# Altium PCB bangmach1.PcbDoc
Units mm, origin at the board's own origin, x right, y up, seen from the top; angles counter-clockwise.
Board outline 99.36 x 91.36 mm, 2 copper layers (Top Layer, Bottom Layer), stack 1.535 mm thick; 51 components, 66 nets, 246 pads, 156 vias.
Unrouted connection lines stored in the file: 2.
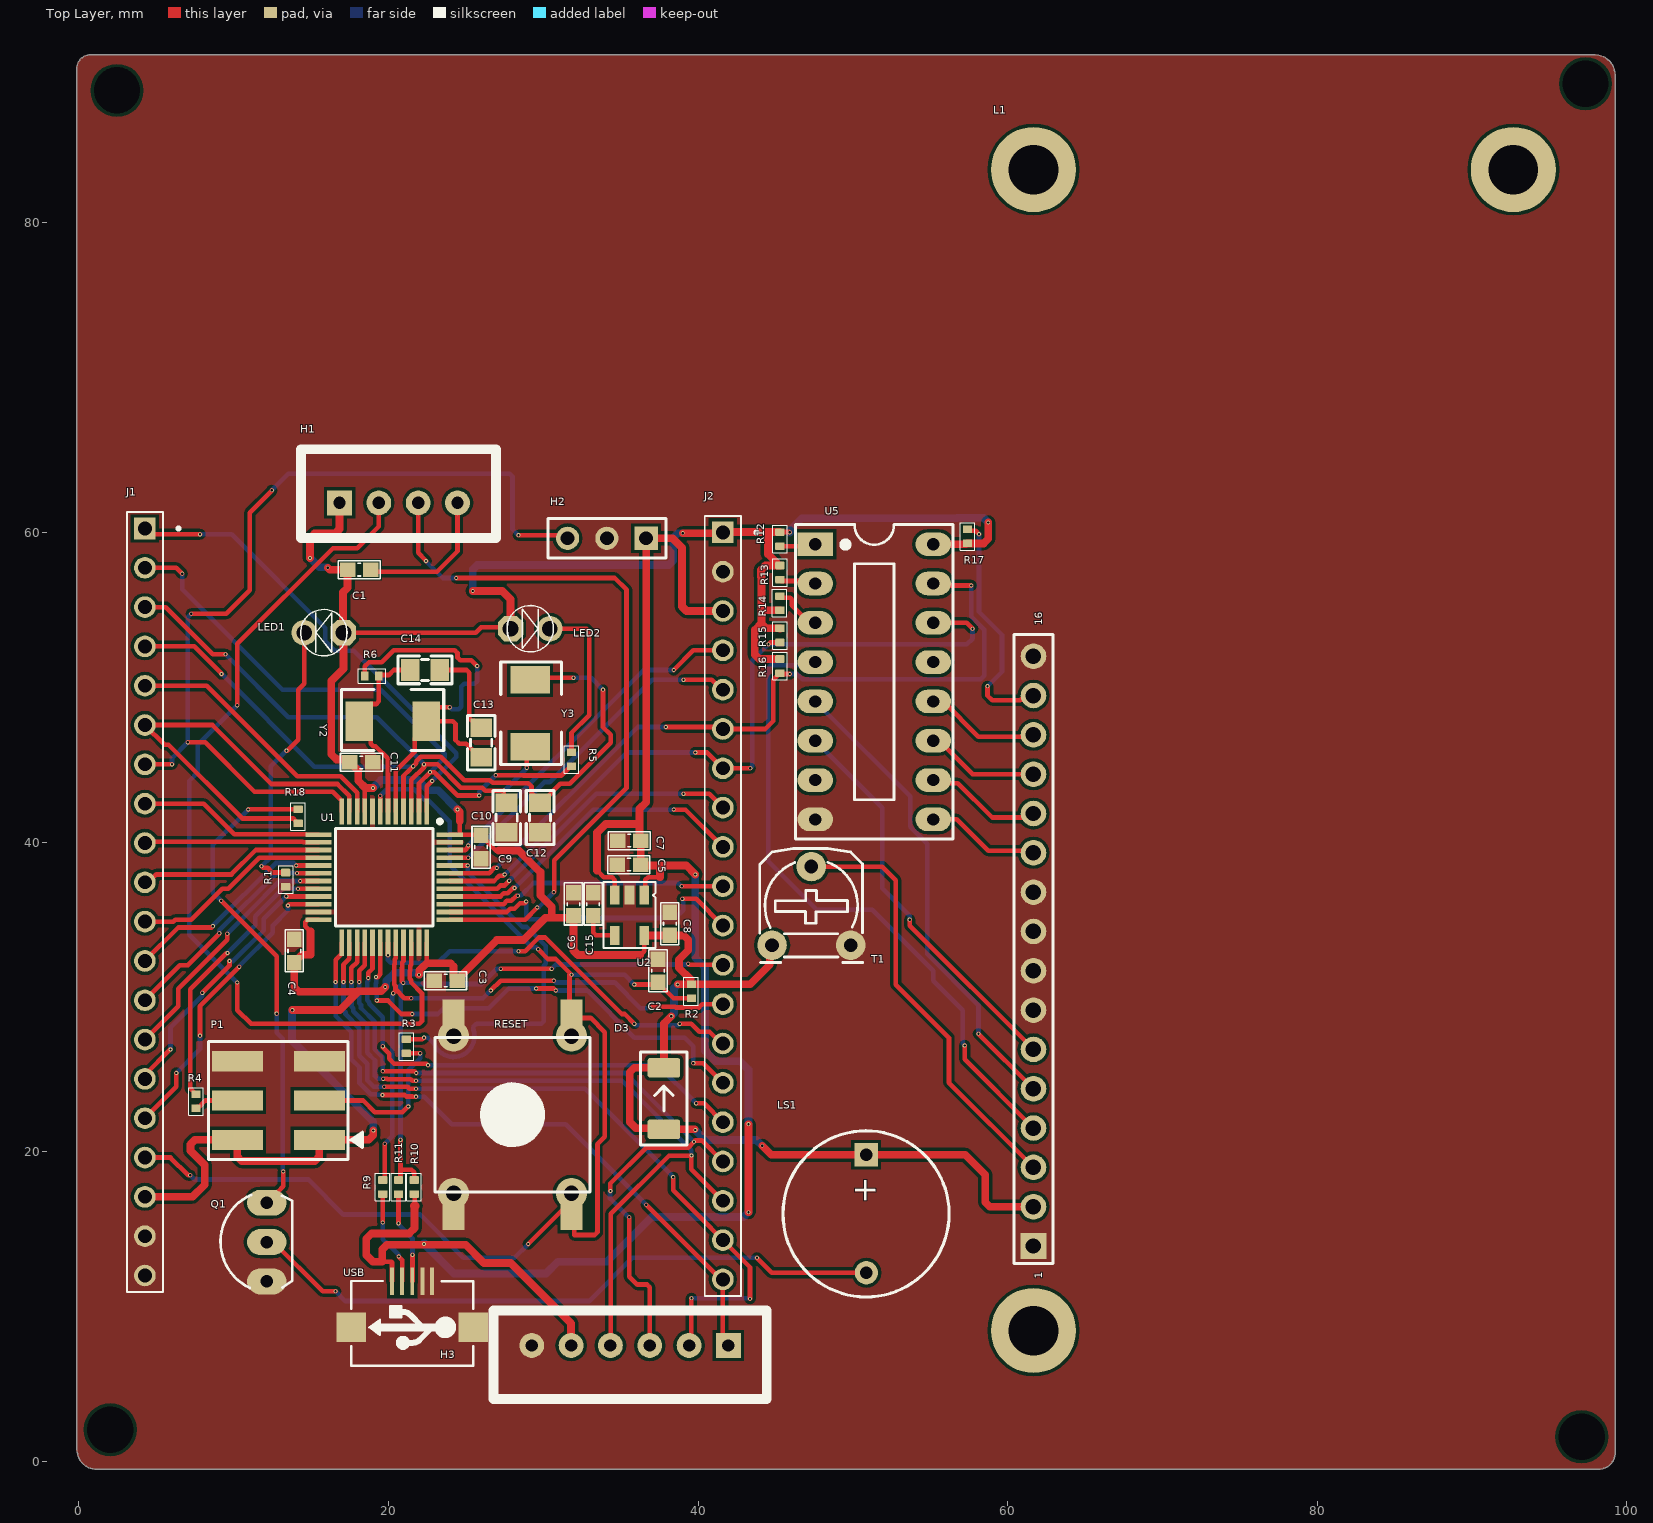
[diagram p0: Top Layer view]
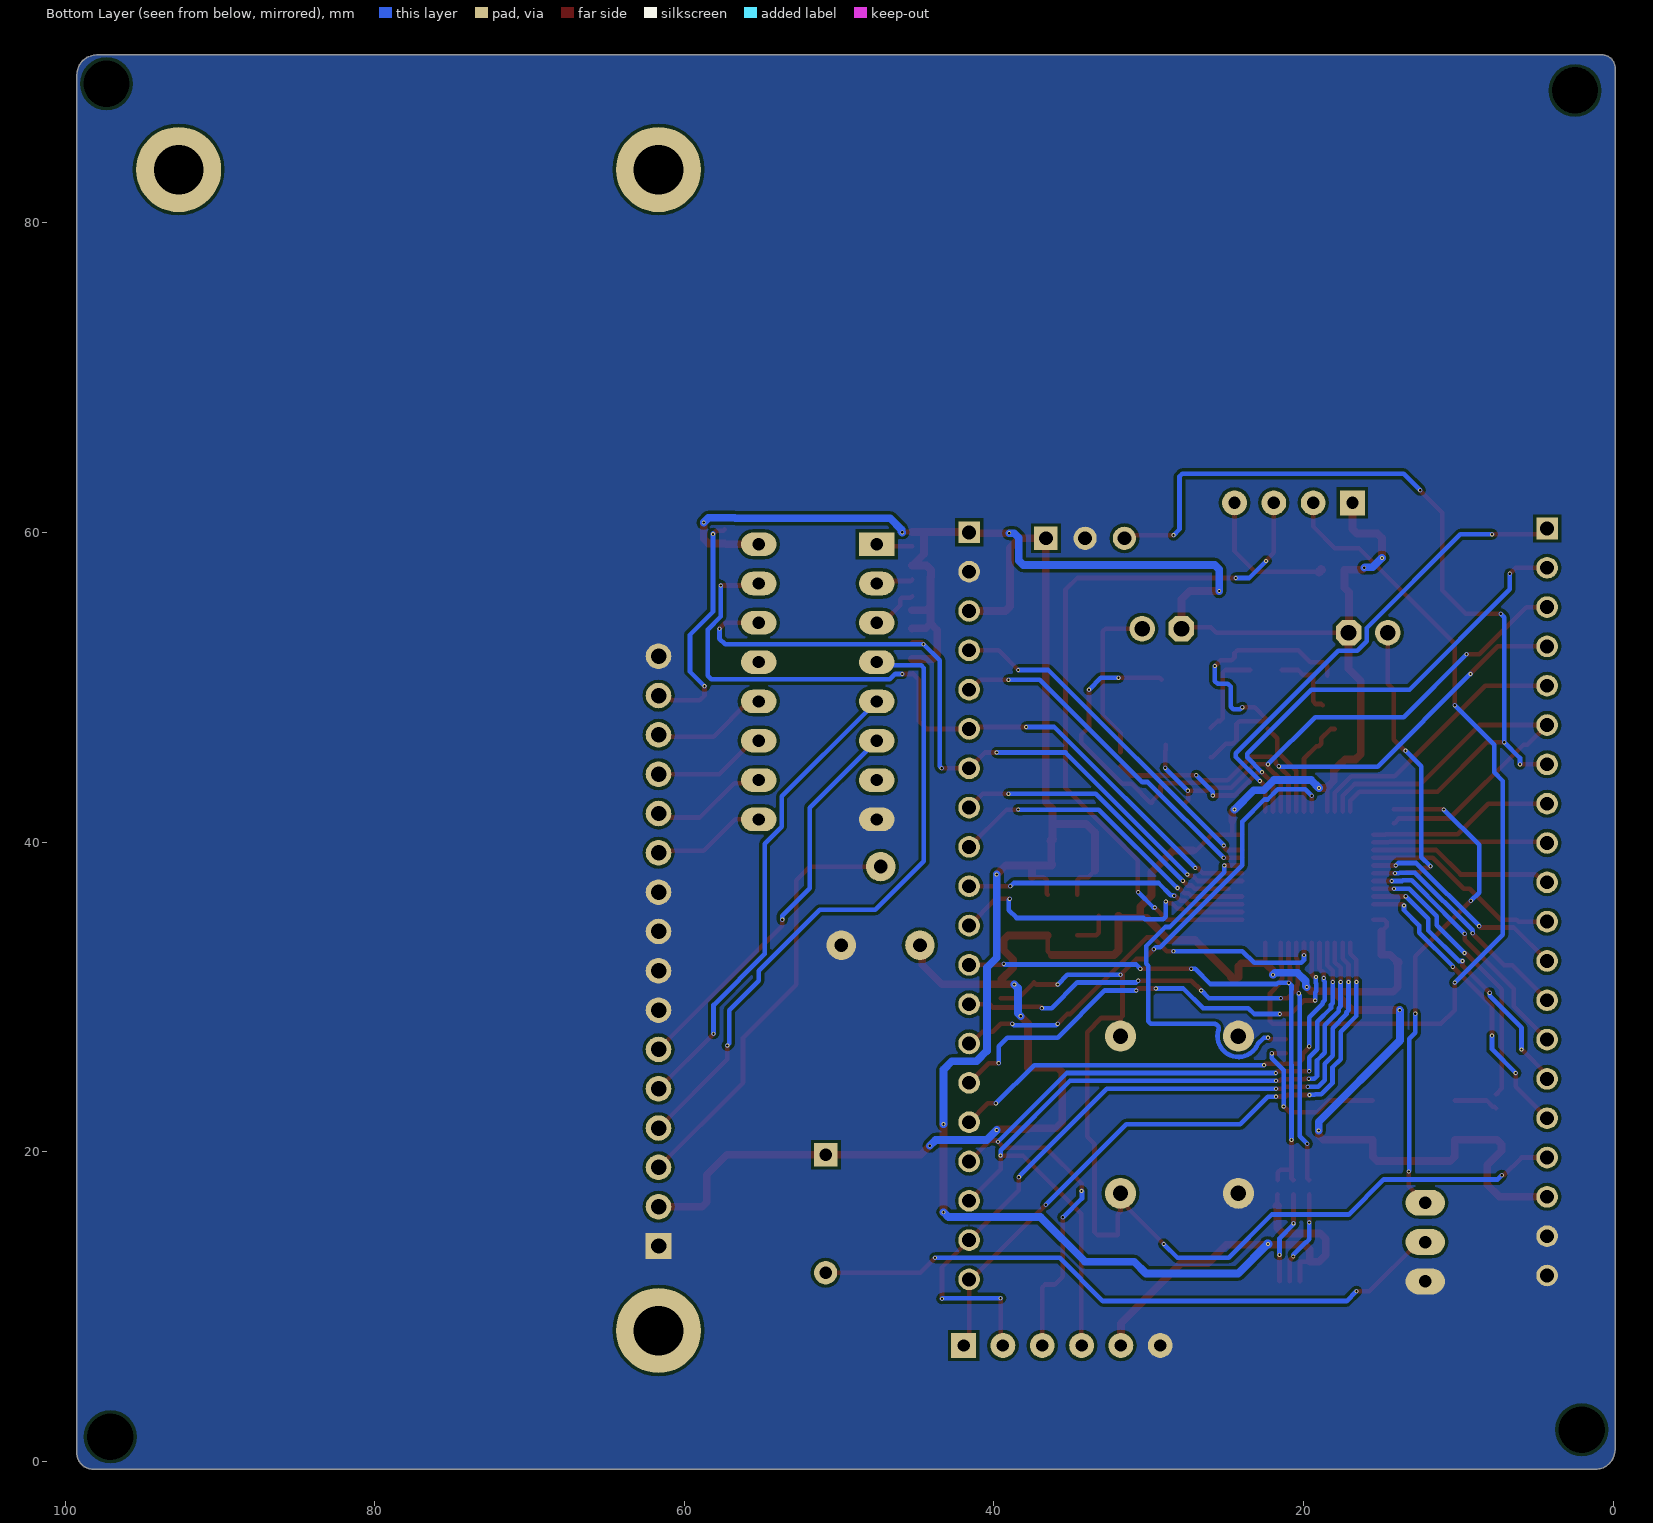
[diagram p1: Bottom Layer view, seen from below]
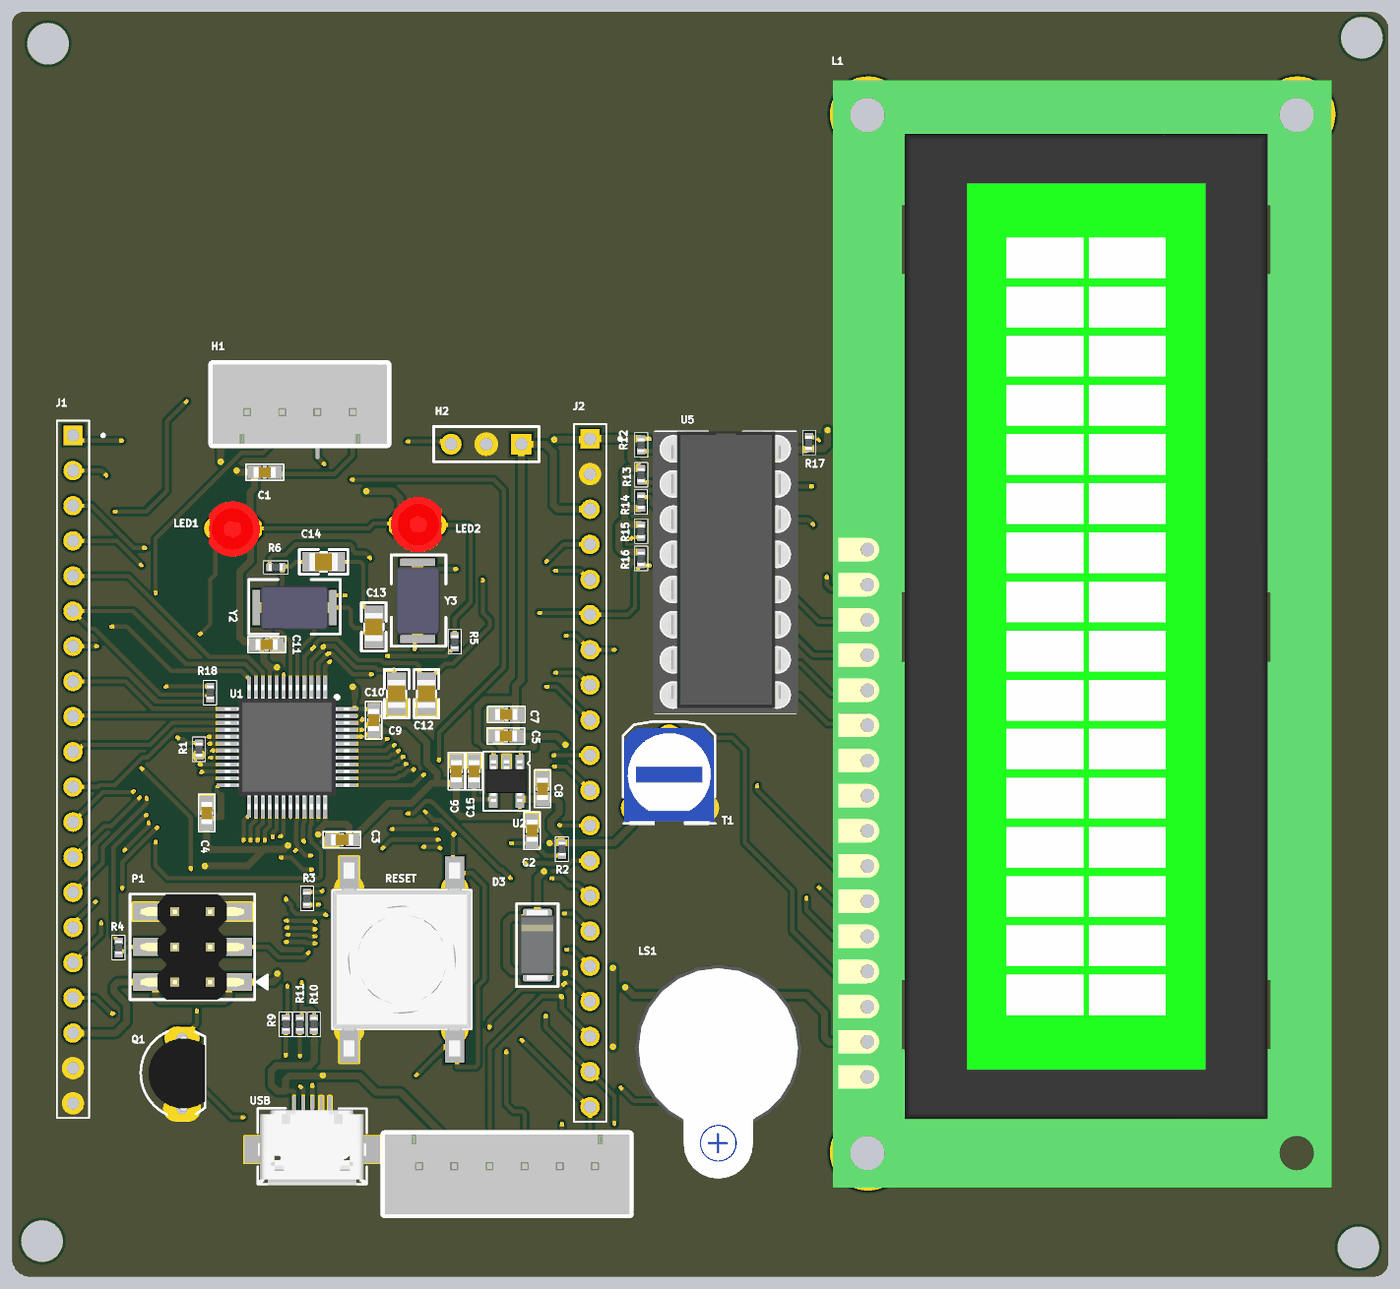
[diagram p2: 3D render of the assembled board from above, using the file's embedded part models]

## Layer stack, top to bottom
Top Solder: solder mask 0.0254, SM-001, Dk 4
Top Layer: signal copper 0.035
Dielectric 1: core 1.465, Core-043, Dk 4.3
Bottom Layer: signal copper 0.035
Bottom Solder: solder mask 0.0254, SM-001, Dk 4

## Board outline
-0.127,0.762 -0.127,90.018 cw(c0.711,90.018) 0.711,90.856 97.968,90.856 cw(c97.968,89.586) 99.238,89.586 99.238,0.533 cw(c98.196,0.533) 98.196,-0.508 1.143,-0.508 cw(c1.143,0.762)

## Design rules (kind name [scope] priority, off if disabled: settings)
Clearance [All] p1: gap=0.2 ignorepadtopadclearanceinfootprint=FALSE
PlaneConnect [All] p1: planeconnectstyle=Direct reliefexpansion=0.508 reliefentries=4 reliefconductorwidth=0.254 reliefairgap=0.254
PolygonConnect [All] p1: connectstyle=Direct reliefconductorwidth=0.254 reliefentries=4 polygonreliefangle="90 Angle" airgapwidth=0.254
RoomDefinition schematic [InComponentClass('schematic')] p1: confinementstyle=ConfineIn formatcopy=TRUE lockcomponents=FALSE outline -48.569,-33.587 2.231,-33.587 2.231,-8.187 -48.569,-8.187
RoutingVias [All] p1: holewidth=0.15 width=0.25 viastyle="Through Hole" minholewidth=0.15 minwidth=0.25 maxholewidth=0.15 maxwidth=0.25
ShortCircuit [All] p1: allowed=TRUE
SolderMaskExpansion [All] p1: expansion=0.102 istentingtop=FALSE
UnRoutedNet [All] p1: checkbadconnections=TRUE
Width [All] p1: maxlimit=1 minlimit=0.3 preferedwidth=0.5 minimp=50.000000 maximp=50.000000 favimp=50.000000
27 further rules are at their usual default settings.

## Components (designator, comment, footprint, x,y, rotation, side; value= is the part's Value field where it differs from the comment)
C1 "104" "tu 0603" 18.106,57.599 r0 top
C2 "105" "tu 0603" 37.41,31.691 r90 top
C3 "104" "tu 0603" 23.694,31.056 r180 top
C4 "104" "tu 0603" 13.915,32.973 r90 top
C5 "105" "tu 0603" 35.531,38.549 r180 top
C6 "106" "tu 0603" 31.949,35.997 r90 top
C7 "104" "tu 0603" 35.556,40.099 r180 top
C8 "104" "tu 0603" 38.172,34.727 r90 top
C9 "20pF" "tu 0805" 27.631,41.597 r270 top
C10 "104" "tu 0603" 25.98,39.692 r270 top
C11 "104" "tu 0603" 18.245,45.153 r0 top
C12 "20pF" "tu 0805" 29.79,41.597 r270 top
C13 "20p" "tu 0805" 25.98,46.423 r90 top
C14 "20p" "tu 0805" 22.354,51.126 r0 top
C15 "223" "tu 0603" 33.219,35.997 r90 top
D3 "1N4007" "DO-214AC-2 (SMA)" 37.791,23.436 r90 top
H1 "SWD" XH2.54M-4 16.836,61.917 r0 top
H2 "Header 3" HDR1X3 36.648,59.631 r180 top
H3 "Header 6P 2.54 Duc Thang" XH2.54M-6 41.957,7.485 r180 top
J1 "2-87220-0" TE_2-87220-0 4.263,36.136 r270 top
J2 "2-87220-0" TE_2-87220-0 41.601,35.882 r270 top
L1 "LCD16x2" "LCD16X2_3 HOLES" 59.127,5.911 r90 top
LED1 "LED 3mm" LED-3MM-RED 17.09,53.535 r180 top
LED2 "LED 3mm" LED-3MM-RED 27.885,53.789 r0 top
LS1 "Coi báo" "Coi Chip Speacker" 50.86,19.804 r270 top
P1 "95278-101A06LF" HDR_M_2X3_2.54_SMD 12.882,23.309 r90 top
Q1 "C1815" TO92 12.137,14.165 r90 top value=C9014
R1 "510" "RES 0402" 13.356,37.584 r270 top
R2 "10k" "RES 0402" 39.569,30.368 r90 top
R3 "100k" "RES 0402" 21.154,26.812 r270 top
R4 "100k" "RES 0402" 7.565,23.256 r90 top
R5 "510" "RES 0402" 31.822,45.354 r270 top
R6 "1M" "RES 0402" 18.921,50.741 r180 top
R9 "20" "RES 0402" 19.63,17.721 r90 top
R10 "4.7K" "RES 0402" 21.662,17.721 r90 top
R11 "20" "RES 0402" 20.646,17.721 r90 top
R12 "10K" "RES 0402" 45.284,59.578 r270 top
R13 "10K" "RES 0402" 45.284,57.419 r270 top
R14 "10K" "RES 0402" 45.284,55.44 r90 top
R15 "10K" "RES 0402" 45.284,53.355 r270 top
R16 "10K" "RES 0402" 45.284,51.376 r270 top
R17 "330" "RES 0402" 57.4,59.756 r270 top
R18 "4.7K" "RES 0402" 14.169,41.671 r90 top
RESET "5ESH935" SW_5ESH935 28.012,22.393 r0 top
T1 "10K" "Bien Tro Tam Giac Dung" 44.776,33.342 r0 top
U1 "STM32F103C8T6" LQFP-48_19.6_393_58X11_SMD 19.721,37.74 r270 top
U2 "RT9193-33GB" SOT23-5 35.569,35.287 r180 top
U5 "PCF8574" DIP16 47.57,59.25 r270 top
USB "USB Micro 5p SMD" "USB Micro 5p SMD" 21.535,11.625 r180 top
Y2 "8Mhz" "Thach Anh 2 chan SMD5032" 20.265,47.82 r0 top value=4Mhz
Y3 "32.768K" "Thach Anh 2 chan SMD5032" 29.155,48.328 r270 top value=4Mhz

## Footprints (in the part's own frame and the unit in brackets; to place one, negate y for a bottom-side part, rotate by r counter-clockwise, add the part's x,y. Pads: shape width x height; smd on the part's side, far side on the other; paste and mask are expansions set on the pad)
"Bien Tro Tam Giac Dung" [mil] "RM065"
  round 75 hole 35: 1(0,0) 2(100,200) 3(200,0)
  silkscreen extent -31,-44 231,246, body extent -28,-50 228,228, height 279
"Coi Chip Speacker" [mm]
  rect 1.5x1.5 hole 0.8: 1(0,0)
  round 1.5 hole 0.8: 2(7.62,0.013)
  silkscreen extent -1.55,-5.38 9.18,5.36, body extent -2.22,-6 13.24,6, height 4.5
DIP16 [mil] "16 PIN, W 300mil, Pin to pin 100mil"
  rect 60x90 hole 31: 1(0,0)
  oval 60x90 hole 31: 2(100,0) 3(200,0) 4(300,0) 5(400,0) 6(500,0) 7(600,0) 8(700,0) 9(700,300) 10(600,300) 11(500,300) 12(400,300) 13(300,300) 14(200,300) 15(100,300) 16(0,300)
  silkscreen extent -50,-50 750,350, body extent -52,-57 752,356, height 299
"DO-214AC-2 (SMA)" [mm]
  rrect25% 1.27x2.1 smd: A(-1.985,0) K(1.985,0)
  silkscreen extent -3,-1.5 3,1.5, body extent -2.6,-1.3 2.6,1.3, height 2.42
HDR1X3 [mm] "Connector; Header; 3 Position"
  rect 1.5x1.5 hole 0.9: 1(0,0)
  round 1.5 hole 0.9: 2(2.54,0) 3(5.08,0)
  silkscreen extent -1.27,-1.27 6.35,1.27
HDR_M_2X3_2.54_SMD [mm]
  rect 1.3x3.3 smd: 1(-2.54,-2.65) 2(-2.54,2.65) 3(0,-2.65) 4(0,2.65) 5(2.54,-2.65) 6(2.54,2.65)
  silkscreen extent -3.81,-5.43 3.81,4.5, body extent -3.81,-3.75 3.81,3.75, height 9.75
"LCD16X2_3 HOLES" [mm] "LCD 16x2"
  rect 1.65x1.65 hole 1: 1(8,-2.54)
  round 1.65 hole 1: 2(10.54,-2.54) 3(13.08,-2.54) 4(15.62,-2.54) 5(18.16,-2.54) 6(20.7,-2.54) 7(23.24,-2.54) 8(25.78,-2.54) 9(28.32,-2.54) 10(30.86,-2.54) 11(33.4,-2.54) 12(35.94,-2.54) 13(38.48,-2.54) 14(41.02,-2.54) 15(43.56,-2.54) 16(46.1,-2.54)
  round 5.5 hole 3.2 paste-2539.97: ""(2.54,-2.54) ""(77.54,-2.54)
  round 5.5 hole 3.2: ""(77.54,-33.54)
  silkscreen extent 6.86,-3.81 47.5,-1.27, body extent 0,-36 80,0, height 17
LED-3MM-RED [mil]
  oct 65x65 hole 40: 1(0,0)
  round 65 hole 40: 2(100,0)
  silkscreen extent -9,-59 109,59, body extent -27,-77 117,80, height 181
LQFP-48_19.6_393_58X11_SMD [mm] "48LQFP"
  rect 1.7x0.3 smd mask+0.076: 1(-4.238,2.75) 2(-4.238,2.25) 3(-4.238,1.75) 4(-4.238,1.25) 5(-4.238,0.75) 6(-4.238,0.25) 7(-4.238,-0.25) 8(-4.238,-0.75) 9(-4.238,-1.25) 10(-4.238,-1.75) 11(-4.238,-2.25) 12(-4.238,-2.75) 25(4.238,-2.75) 26(4.238,-2.25) 27(4.238,-1.75) 28(4.238,-1.25) 29(4.238,-0.75) 30(4.238,-0.25) 31(4.238,0.25) 32(4.238,0.75) 33(4.238,1.25) 34(4.238,1.75) 35(4.238,2.25) 36(4.238,2.75)
  rect 0.3x1.7 smd mask+0.076: 13(-2.75,-4.238) 14(-2.25,-4.238) 15(-1.75,-4.238) 16(-1.25,-4.238) 17(-0.75,-4.238) 18(-0.25,-4.238) 19(0.25,-4.238) 20(0.75,-4.238) 21(1.25,-4.238) 22(1.75,-4.238) 23(2.25,-4.238) 24(2.75,-4.238) 37(2.75,4.238) 38(2.25,4.238) 39(1.75,4.238) 40(1.25,4.238) 41(0.75,4.238) 42(0.25,4.238) 43(-0.25,4.238) 44(-0.75,4.238) 45(-1.25,4.238) 46(-1.75,4.238) 47(-2.25,4.238) 48(-2.75,4.238)
  silkscreen extent -3.72,-3.15 3.15,3.73, body extent -4.5,-4.5 4.5,4.5, height 1.7
"RES 0402" [mm]
  rrect20% 0.49x0.6 smd: 1(-0.455,0) 2(0.455,0)
  silkscreen extent -0.89,-0.46 0.89,0.48, body extent -0.47,-0.25 0.53,0.25, height 0.32
SOT23-5 [mm] "CASE: SOT"
  rect 0.62x1.22 smd mask+0.076: 1(-0.953,-1.31) 2(-0.003,-1.31) 3(0.947,-1.31) 4(0.952,1.31) 5(-0.953,1.31)
  silkscreen extent -1.69,-2.14 1.69,2.14, body extent -1.5,-1.5 1.5,1.5, height 1.41
SW_5ESH935 [mm]
  rect 1.4x2.4 smd: 1(-3.81,6.25) 2(-3.81,-6.25) 3(3.81,6.25) 4(3.81,-6.25)
  round 2 hole 1: 1(-3.81,5.08) 2(-3.81,-5.08) 3(3.81,5.08) 4(3.81,-5.08)
  silkscreen extent -5,-5 5,5, body extent -5,-7 5,7, height 6.37
TE_2-87220-0 [mm]
  rect 1.398x1.398 hole 0.89: 1(-24.13,0)
  round 1.398 hole 0.89: 2(-21.59,0) 3(-19.05,0) 4(-16.51,0) 5(-13.97,0) 6(-11.43,0) 7(-8.89,0) 8(-6.35,0) 9(-3.81,0) 10(-1.27,0) 11(1.27,0) 12(3.81,0) 13(6.35,0) 14(8.89,0) 15(11.43,0) 16(13.97,0) 17(16.51,0) 18(19.05,0) 19(21.59,0) 20(24.13,0)
  silkscreen extent -25.2,-1.17 25.2,2.27
"Thach Anh 2 chan SMD5032" [mil] "DO-214-AA/SMB; 2 C-Bend Leads; Body 5.3 x 3.6 mm, inc. leads (LxW)"
  rect 70x100 smd: 1(-85,0) 2(85,0)
  silkscreen extent -130,-75 130,80, body extent -98,-63 98,63, height 51
TO92 [mil] "TO-92"
  oval 66x100 hole 32: 1(-100,0) 2(0,0) 3(100,0)
  silkscreen extent -117,-65 120,118, body extent -109,-66 109,95, height 245
"tu 0603" [mm] "Chip Capacitor, 2-Leads, Body 1,60x0,80mm, IPC Medium Density"
  rect 1x0.95 smd mask+0.076: 1(-0.75,0) 2(0.75,0)
  silkscreen extent -1.35,-0.58 1.37,0.58, body extent -0.8,-0.4 0.8,0.4, height 0.9
"tu 0805" [mm] "Compoment SMD 80x50mil"
  rect 1.2x1.4 smd: 1(-0.946,-0.003) 2(0.954,-0.003)
  silkscreen extent -1.75,-0.89 1.75,0.89, body extent -1.01,-0.64 1.01,0.63, height 0.61
"USB Micro 5p SMD" [mil]
  rect 10x70 smd: 1(51.18,0) 2(25.59,0) 3(0,0) 4(-25.59,0) 5(-50,0)
  rect 74.8x74.8 smd: 5(-155.51,116.84) 5(155.51,116.84)
  silkscreen extent -155,-1 155,215, body extent -157,5 158,218, height 107
XH2.54M-4 [mm]
  rect 1.6x1.6 hole 0.8: 1(0,0)
  round 1.6 hole 0.8: 2(2.54,0) 3(5.08,0) 4(7.62,0)
  silkscreen extent -2.48,-2.26 10.1,3.46, body extent -2.48,-2.26 10.1,3.48, height 6.91
XH2.54M-6 [mm]
  rect 1.6x1.6 hole 0.8: 1(0,0)
  round 1.6 hole 0.8: 2(2.54,0) 3(5.08,0) 4(7.62,0) 5(10.16,0) 6(12.7,0)
  silkscreen extent -2.48,-2.26 15.18,3.46, body extent -2.48,-2.26 15.18,3.48, height 6.91

## Part data
C1 C2 C5 C6 C7 C8 C9 C12 C13 C14 C15: library part "Tu 0402 220nF 6.3V 20%", "Dán", Chung_Loai=Dán, Don_Vi=Con, Ma_Hang=MH008102, So_Chan=2, Ten_Linh_Kien="Tụ 0402 220nF 6.3V 20%"
C3 C4 C10 C11: library part "Tu 0603 104 50V 10%", "Dán", Chung_Loai=Dán, Don_Vi=Con, Ma_Hang=MH004568, So_Chan=2, Ten_Linh_Kien="Tụ 0603 104-100nF 10% 50V"
D3: library part D_SMA, "Diode SMD SMA (DO-214AA)"
H1: library part "Header 4P 2.54 Duc Thang", "Cắm", Chung_Loai=Cắm, Don_Vi=Con, Ma_Hang=MH001285, Ten_Linh_Kien="Header 4P XH2.54-4P Đực Thẳng"
H2: "Header, 3-Pin", LatestRevisionDate=17-Jul-2002, LatestRevisionNote="Re-released for DXP Platform.", Publisher="Altium Limited"
H3: "Cắm", Chung_Loai=Cắm, Don_Vi=Con, Ma_Hang=MH001972, Ten_Linh_Kien="Header 6P XH2.54-6P Đực Thẳng"
J1 J2: Package=None, Availability=Warning, Centerline_Pitch="2.54 mm[.1 in]", EU_RoHS_Compliance=Compliant, MF="TE Connectivity", MP=2-87220-0, Number_of_Positions=20, Price=None, Product_Type=Connector, Purchase-URL=https://pricing.snapeda.com/search/part/2-87220-0/?ref=eda, SnapEDA_Link=https://www.snapeda.com/parts/2-87220-0/TE%20Connectivity%20AMP%20Connectors/view-part/397035/?ref=snap
L1: "Character LCD 16x2"
LED1 LED2: library part "LED 3mm Do", "Cắm", Chung_Loai=Cắm, Don_Vi=Con, Ma_Hang=MH003892, Ten_Linh_Kien="Led 3MM Phủ Đỏ (10c)"
LS1: library part "Coi Chip Speaker", "Còi chip"
P1: library part HDR_M_95278-101A06LF, "BERGSTIK HDR 6POS .100\" DR SMT", Current Rating=-, Insulation Color=Black, Manufacturer="Amphenol FCI", Material Flammability Rating="UL94 V-0", Supplier Part Number 1=609-3487-6-ND, Applications=-, Category="Connectors, Interconnects", ComponentLink1Description=http://cdn.amphenol-icc.com/media/wysiwyg/files/drawing/95278.pdf, ComponentLink1URL=http://cdn.amphenol-icc.com/media/wysiwyg/files/drawing/95278.pdf, Connector Type=Header, Contact Finish - Mating="Gold, GXT™", Contact Finish - Post=Tin, Contact Finish Thickness - Mating="30µin (0.76µm)", Contact Finish Thickness - Post="78.7µin (2.00µm)", Contact Length - Mating="0.232\" (5.90mm)", Contact Length - Post=-, Contact Material="Phosphor Bronze", Contact Shape=Square, Contact Type="Male Pin", Fastening Type=Push-Pull, Features="Pick and Place", Ingress Protection=-, Insulation Height="0.100\" (2.54mm)", Insulation Material=Thermoplastic, Manufacturer Part Number=95278-101A06LF, Mated Stacking Heights=-, Mounting Type="Surface Mount", Number of Positions=6, Number of Positions Loaded=All, Number of Rows=2, Operating Temperature=-, Overall Contact Length=-, Packaging=Digi-Reel®, Part Status=Active, Pitch - Mating="0.100\" (2.54mm)", Pricing 1="1=1.09, 10=0.96, 100=0.8284 (USD)", RoHS="RoHS Compliant", Row Spacing - Mating="0.100\" (2.54mm)", Shrouding=Unshrouded, Stock 1=11648, Style="Board to Board", Supplier 1=Digi-Key, Termination=Solder, Voltage Rating=-
Q1: library part "Trans C1815 DIP", "NPN transistor"
R1 R3 R4 R5 R6 R9 R10 R11 R12 R13 R14 R15 R16 R17 R18: library part "RES 0402", "RES SMD 0402", Manufacturer="Vishay Dale", Manufacturer Part Number=CRCW040210K0FKED, Operating Temperature="-55°C ~ 155°C", Package / Case="0402 (1005 Metric)", Power (Watts)="0.063W, 1/16W", Resistance (Ohms)=10k, Supplier Part Number 1=541-10.0KLCT-ND, Temperature Coefficient=±100ppm/°C, Tolerance=±1%, Category=Resistors, ComponentLink1Description=http://www.vishay.com/docs/20035/dcrcwe3.pdf, ComponentLink1URL=http://www.vishay.com/docs/20035/dcrcwe3.pdf, Composition="Thick Film", Features="Automotive AEC-Q200", Height="0.016\" (0.40mm)", Number of Terminations=2, Packaging="Cut Tape (CT)", Pricing 1="10=0.083, 50=0.0444, 200=0.0255, 1000=0.0174 (USD)", RoHS="RoHS Compliant", Size / Dimension="0.039\" L x 0.020\" W (1.00mm x 0.50mm)", Stock 1=2392462, Supplier 1=Digi-Key, Supplier Device Package="0402 (1005 Metric)"
R2: library part "RES 0402", "RES SMD 0402", Manufacturer="Vishay Dale", Manufacturer Part Number=CRCW040210K0FKED, Operating Temperature="-55°C ~ 155°C", Package / Case="0402 (1005 Metric)", Power (Watts)="0.063W, 1/16W", Supplier Part Number 1=541-10.0KLCT-ND, Temperature Coefficient=±100ppm/°C, Tolerance=±1%, Category=Resistors, ComponentLink1Description=http://www.vishay.com/docs/20035/dcrcwe3.pdf, ComponentLink1URL=http://www.vishay.com/docs/20035/dcrcwe3.pdf, Composition="Thick Film", Features="Automotive AEC-Q200", Height="0.016\" (0.40mm)", Number of Terminations=2, Packaging="Cut Tape (CT)", Pricing 1="10=0.083, 50=0.0444, 200=0.0255, 1000=0.0174 (USD)", Resistance (Ohms)=10k, RoHS="RoHS Compliant", Size / Dimension="0.039\" L x 0.020\" W (1.00mm x 0.50mm)", Stock 1=2392462, Supplier 1=Digi-Key, Supplier Device Package="0402 (1005 Metric)"
RESET: library part SW_5ESH935, "SWITCH TACTILE SPST-NO 0.05A 24V", Contact Rating @ Voltage="0.05A @ 24VDC", Illumination Type, Color=-, Manufacturer 1="MEC Switches", Operating Force=350gf, Operating Temperature="-40°C ~ 160°C", Supplier Part Number 1=679-2579-ND, Actuator Height off PCB, Vertical=6.40mm, Actuator Length, Right Angle=-, Actuator Material="Polyphenylene Sulfide (PPS)", Actuator Orientation="Top Actuated", Actuator Type="Plunger for Cap", Category 1=Switches, Circuit=SPST-NO, ComponentLink1Description=http://www.mec.dk/files/MEC/brochures/MEC_ProductCatalogueno7_multimec-5-series-switches.pdf, ComponentLink1URL=http://www.mec.dk/files/MEC/brochures/MEC_ProductCatalogueno7_multimec-5-series-switches.pdf, Description 1="SWITCH TACTILE SPST-NO 0.05A 24V", Features="Sealed - Flux Protection", Illumination=Non-Illuminated, Illumination Voltage (Nominal)=-, Ingress Protection="IP67 - Dust Tight, Waterproof", Manufacturer Part Number 1=5ESH935, Mechanical Life="10,000,000 Cycles", Mounting Type="Surface Mount", Outline="10.10mm x 10.10mm", Packaging=Tube, Part Status=Active, Pricing 1="1=2.68, 10=2.575, 25=2.3692, 50=2.06, 100=1.957, 250=1.90552, 500=1.854, 1000=1.442, 5000=1.339 (USD)", RoHS 1="RoHS Compliant", Stock 1=0, Supplier 1=Digi-Key, Switch Function=Off-Mom, Switch Travel=1.00mm, Termination Style="Gull Wing"
T1: library part "Bien tro tam giac 100K Dung", "Cắm", Chung_Loai=Cắm, Don_Vi=Con, Ma_Hang=MH003711, Ten_Linh_Kien="Biến Trở Tam Giác 104-100K RM065"
U1: library part IC_STM32F103C8T6, "ARM® Cortex®-M3 STM32F1 Microcontroller IC 32-Bit 72MHz 64KB (64K x 8) FLASH 48-LQFP (7x7)", Alternate Part Number-1=NA, Case/Package=LQFP48, Manufacturer=STMicroelectronics, Manufacturer Part Number=STM32F103C8T6, Supplier Part Number-1=STM32F103C8T6, Supplier-1=LCSC
U2: library part REG_5.5V-3.3V-0.3A-1W-SOT-23-5, "Linear Voltage Regulator IC 1 Output 300mA SOT-23-5", Alternate Part Number-1=NA, Case/Package=SOT-23-5, Manufacturer="Richtek USA Inc.", Supplier Part Number-1=C15651, Manufacturer Part Number=RT9193-33GB, Supplier-1=LCSC
U5: "I2C PORT EXPANDER", Frequency - Clock=100KHz, Manufacturer="NXP Semiconductors", Manufacturer Part Number=PCF8574T/3,512, Operating Temperature="-40°C ~ 85°C", Package / Case="16-SOIC (7.5mm Width)", Supplier Part Number=568-1076-5-ND, Voltage - Supply="2.5 V ~ 6 V", Category="Integrated Circuits (ICs)", Includes=POR, Interface=I²C, Interrupt Output=Yes, Number of I /O=8, Packaging=Tube, RoHS="RoHS Compliant", Supplier=Digi-Key, Supplier 1=Digi-Key, Supplier Part Number 1=568-1076-5-ND
USB: "USB Type B", Ma_Hang=MH001020, Ten="MicroUSB MK5P SMD"
Y2 Y3: library part "Thach Anh 2 chan SMD 5032", "Crystal For all Crystal 2pin."

## Free pads (board coordinates)
  round 1.524 hole 3: 1(2.028,2.049) 1(2.46,88.562) 1(97.075,1.592) 1(97.329,88.994)

## Via types
v1: diameter 0.25, hole 0.15, Top Layer to Bottom Layer, 156 vias

## Nets (pads, with @x,y where several pads share a name; then routed paths per layer and width w, separated by ;. In a path a pad name is that pad's centre, name@x,y a point inside that pad or via, vN(x,y) a via of type N, cw(c..) or ccw(c..) an arc to the next point about the centre after c; other vN are vias at no path point)
5V: C5.1 C7.1 H2.1 H3.5 J2.3 R10.1 U2.1 U2.3 USB.1 | length 118.7
  Top Layer w0.3: 19.605,12.895 20.199,12.895 20.222,12.872 USB.1@20.222,11.625 ; R10.1 21.688,17.241 21.688,16.502 ; 33.473,38.168 33.917,37.724 34.446,37.724 34.621,37.548 U2.3 ; U2.1 36.595,36.671 36.595,37.561 36.771,37.736 37.537,37.736
  Top Layer w0.5: 21.688,16.502 21.688,15.075 21.336,14.724 18.915,14.724 18.563,14.372 18.563,13.327 18.995,12.895 19.605,12.895 19.605,13.687 19.906,13.987 24.987,13.987 26.163,12.811 27.893,12.811 31.797,8.907 H3.5 ; 33.473,38.168 33.473,40.617 34.028,41.172 36.217,41.172 ; C7.1@36.217,40.187 36.217,41.172 ; C5.1 36.331,38.498 37.563,38.498 ; C5.1@36.293,38.562 C7.1@36.293,40.086 ; 37.537,37.736 37.537,38.473 37.563,38.498 ; v1(39.823,37.914) 39.239,38.498 37.563,38.498 ; J2.3 39.253,54.932 38.96,55.225 38.96,59.022 38.35,59.631 H2.1 36.648,42.588 36.217,42.157 36.217,41.172 ; v1(43.252,16.096) v1(43.252,21.785)
  Top Layer w0.6: C7.1@36.217,40.187 C7.1 C7.1@36.293,40.086 ; C5.1 C5.1@36.293,38.562
  Bottom Layer w0.5: v1@22.323,14.038 24.228,12.133 30.171,12.133 30.933,12.895 34.108,12.895 36.996,15.783 42.94,15.783 v1(43.252,16.096) ; v1(39.823,37.914) 39.823,32.525 40.452,31.896 40.452,26.516 41.125,25.843 42.725,25.843 43.252,25.316 v1(43.252,21.785)
  Bottom Layer w0.6: v1(22.297,14.038) v1@22.323,14.038
BOOT0: R3.1 U1.44 | length 24.6
  Top Layer w0.3: R3.1 22.191,27.267 v1(22.297,27.373) ; U1.44 v1(25.112,38.49)
  Bottom Layer w0.3: v1(22.297,27.373) 22.551,27.373 22.946,26.978 ccw(c24.202,27.473) 25.491,27.875 cw(c25.778,27.962) 25.681,28.246 25.728,28.262 29.861,28.262 30.036,28.438 30.036,32.025 30.166,32.155 30.166,33.292 28.94,34.519 28.649,34.519 25.112,38.056 v1(25.112,38.49)
BOOT1: R4.2 U1.20 | length 18.3
  Top Layer w0.3: R4.2 7.51,23.711 7.415,23.806 7.415,23.861 7.184,24.092 7.184,30.493 9.525,32.834 v1(9.597,32.834) ; U1.20 v1(14.156,36.989) ; v1(14.156,36.989) v1(14.156,36.989)
  Bottom Layer w0.3: v1(9.597,32.834) 11.399,34.636 11.399,35.216 13.179,36.996 13.474,36.996 13.48,36.99 14.155,36.99 v1(14.156,36.989)
CS: H3.1 J2.20 U1.25 | length 43
  Top Layer w0.3: v1(16.582,30.97) 16.582,32.413 16.971,32.802 U1.25 ; v1(19.617,23.665) 21.052,23.665 21.146,23.571 21.527,23.571 21.535,23.563 v1(21.773,23.563) ; v1(36.648,16.578) 41.474,11.752 J2.20 41.601,7.841 H3.1
  Bottom Layer w0.3: v1(16.582,30.97) 16.582,28.77 17.598,27.754 17.598,25.976 18.13,25.444 18.13,24.421 18.845,23.706 19.249,23.706 19.265,23.69 19.592,23.69 v1(19.617,23.665) ; v1(21.773,23.563) 22.297,23.563 24.075,21.785 31.441,21.785 v1(36.648,16.578)
D0: C2.2 C3.2 C4.2 C5.2 C6.2 C7.2 C8.2 C9.2 C10.2 C11.2 C12.2 C15.2 H2.2 H3.6 J1.19 J1.20 J2.2 L1.1 L1.7 L1.8 L1.9 L1.10 L1.16 P1.5 P1.6 Q1.1 R1.2 RESET.1 RESET.2 T1.3 U1.8 U1.23 U1.35 U1.47 U2.2 U5.8 USB.4 USB.5
D4: L1.11 U5.9 | length 7.4
  Top Layer w0.3: U5.9 56.714,41.47 58.746,39.438 61.54,39.438 L1.11
D5: L1.12 U5.10 | length 7.6
  Top Layer w0.3: U5.10 55.386,43.814 56.783,43.814 59.003,41.594 61.411,41.594 L1.12
D6: L1.13 U5.11 | length 7.4
  Top Layer w0.3: U5.11 55.571,46.55 57.73,44.391 L1.13
D7: L1.14 U5.12 | length 7.5
  Top Layer w0.3: U5.12 55.825,49.09 58.111,46.804 61.54,46.804 L1.14
E: L1.6 U5.6 | length 25.8
  Top Layer w0.3: v1(53.666,34.993) 53.666,34.612 L1.6
  Bottom Layer w0.3: U5.6 47.62,46.55 48.185,45.985 48.185,45.935 51.888,42.232 51.888,37.025 53.666,35.247 v1(53.666,34.993)
LED+: L1.15 R17.1 | length 15.6
  Top Layer w0.3: R17.1 57.495,60.116 57.931,60.116 v1(58.146,59.901) ; v1(58.695,50.081) 58.695,49.471 59,49.166 60.817,49.166 60.863,49.213 61.409,49.213 L1.15
  Bottom Layer w0.3: v1@58.146,59.941 58.146,54.897 59.635,53.408 59.635,51.021 v1(58.695,50.081)
MISO: H3.4 J2.18 U1.27 | length 51.2
  Top Layer w0.3: v1(17.598,30.97) 17.598,31.881 17.971,32.254 U1.27 ; v1(19.66,24.706) 19.923,24.706 19.939,24.69 21.441,24.69 21.544,24.587 v1(21.773,24.587) ; H3.4 34.362,7.51 34.362,15.994 38.121,19.753 v1(39.569,19.753) 39.569,18.864 J2.18
  Bottom Layer w0.3: v1(17.598,30.97) 17.608,30.961 17.608,29.396 17.725,29.278 17.725,29.079 18.622,28.182 18.622,26.404 19.13,25.896 19.13,24.882 19.306,24.706 v1(19.66,24.706) ; v1(21.773,24.587) 35.085,24.587 39.569,20.103 v1(39.569,19.753)
MOSI: H3.3 J2.17 U1.28 | length 52
  Top Layer w0.3: v1(18.108,30.97) 18.108,31.683 18.471,32.047 U1.28 ; v1(19.63,25.206) 20.13,25.206 20.146,25.19 21.686,25.19 v1(21.789,25.087) ; v1(34.337,17.467) 34.337,17.95 36.648,20.261 39.355,20.261 v1(39.737,20.642) 39.824,20.73 40.244,20.73 J2.17 ; v1(35.556,15.765) 35.556,11.93 36.064,11.422 36.701,11.422 36.877,11.246 H3.3
  Bottom Layer w0.3: v1(18.108,30.97) 18.108,29.603 18.225,29.485 18.225,29.286 19.122,28.389 19.122,26.611 19.63,26.103 v1(19.63,25.206) ; v1(21.789,25.087) 35.292,25.087 v1(39.737,20.642) ; v1(34.337,17.467) 34.311,17.442 34.311,16.985 35.531,15.765 v1(35.556,15.765)
NetC13_2: C13.2 C14.2 | length 5.8
  Top Layer w0.3: C14.2@23.44,51.122 25.043,51.122 25.218,50.946 25.218,48.003 25.394,47.828 25.534,47.828 C13.2
NetC15_1: C15.1 U2.4 | length 2.6
  Top Layer w0.3: C15.1 33.219,34.153 33.395,33.977 U2.4
NetLED1_2: LED1.2 R1.1 | length 18
  Top Layer w0.3: v1(11.795,38.441) 11.896,38.34 12.192,38.34 12.493,38.039 R1.1 ; v1(13.407,45.915) 13.471,45.915 14.169,46.614 14.169,49.852 14.55,50.233 LED1.2
  Bottom Layer w0.3: v1(11.795,38.441) 12.391,39.037 12.391,44.899 v1(13.407,45.915)
NetLED2_2: LED2.2 R5.1 | length 10.9
  Top Layer w0.3: LED2.2 32.79,53.789 32.965,53.613 32.965,48.201 31.822,47.058 R5.1
NetLS1_2: LS1.2 Q1.2 | length 41.9
  Top Layer w0.3: Q1.2 12.569,14.165 15.744,10.99 v1(16.582,10.99) ; v1(43.803,13.149) 44.768,12.184 LS1.2
  Bottom Layer w0.3: v1(16.582,10.99) 17.217,10.355 32.965,10.355 35.759,13.149 v1(43.803,13.149)
NetP1_3: P1.3 R3.2 | length 10.9
  Top Layer w0.3: P1.3 17.471,23.309 17.474,23.312 17.723,23.312 17.725,23.309 18.36,23.309 19.122,22.547 20.9,22.547 v1(21.281,22.928) ; R3.2 v1(22.043,26.357)
  Bottom Layer w0.3: v1(21.281,22.928) 21.273,22.936 21.273,25.278 22.043,26.048 v1(22.043,26.357)
NetP1_4: P1.4 R4.1 | length 2.9
  Top Layer w0.3: R4.1 7.66,22.896 7.762,22.896 8.175,23.309 P1.4
NetQ1_3: Q1.3 R18.2 | length 31.9
  Top Layer w0.3: v1(9.191,36.212) 12.772,32.631 v1(12.772,28.923) ; v1(10.943,42.105) 10.964,42.126 R18.2 ; Q1.3 12.197,16.705 12.832,17.341 12.832,17.4 13.204,17.772 v1(13.204,18.73)
  Bottom Layer w0.3: v1(9.191,36.212) 8.657,36.746 8.657,39.819 v1(10.943,42.105) ; v1(12.772,28.923) 12.772,27.678 13.163,27.287 13.163,18.771 v1(13.204,18.73)
NetR9_1: R9.1 USB.2 | length 6.1
  Top Layer w0.3: v1(19.63,15.435) R9.1 ; v1(20.659,13.229) 20.885,13.003 USB.2
  Bottom Layer w0.3: v1(19.63,15.435) 19.63,14.341 19.806,14.165 19.85,14.165 20.659,13.356
NetR11_1: R11.1 USB.3 | length 6
  Top Layer w0.3: v1(20.646,15.374) R11.1 ; USB.3 21.548,11.638 v1(21.548,13.337)
  Bottom Layer w0.3: v1(20.646,15.374) 20.646,15.308 21.548,14.406 v1(21.548,13.337)
NetR12_2: R12.2 U5.1 | length 2.3
  Top Layer w0.3: R12.2 47.443,59.123 U5.1
NetR13_2: R13.2 U5.2 | length 2.4
  Top Layer w0.3: R13.2 45.379,56.869 47.411,56.869 U5.2
NetR14_2: R14.2 U5.3 | length 3.2
  Top Layer w0.3: R14.2 45.379,55.8 45.94,55.8 46.046,55.695 46.046,55.314 47.189,54.17 U5.3
NRST: C2.1 J1.17 R2.1 RESET.3 RESET.4 U1.7 | length 84.5
  Top Layer w0.3: J1.17 5.914,19.626 7.057,18.483 v1(7.184,18.483) ; U1.7 v1(19.471,43.002) ; v1(29.028,14.038) 29.046,14.056 31.337,16.347 31.337,16.368 31.801,16.832 RESET.4@31.822,16.832 ; v1(29.666,33.085) 30.298,32.453 30.806,32.453 v1(31.822,31.437) ; 31.695,31.437 31.695,28.77 RESET.3@31.822,28.643 ; RESET.4@31.822,17.313 RESET.4@31.822,16.832 ; RESET.3@31.822,27.473 RESET.3@31.822,28.643 ; v1(35.886,30.802) 37.271,30.802 C2.1 37.41,30.916 38.413,29.913 R2.1 ; RESET.4@31.822,16.832 31.822,16.143 32,15.965 32,14.622 33.323,14.622 33.499,14.798 33.499,20.49 33.981,20.972 33.981,27.729 33.067,28.643 RESET.3@31.822,28.643
  Bottom Layer w0.3: v1(7.184,18.483) 7.456,18.212 14.822,18.212 17.09,15.943 21.789,15.943 21.792,15.946 22.041,15.946 22.17,15.817 24.837,13.149 28.139,13.149 v1(29.028,14.038) ; v1(19.471,43.002) 19.879,43.41 21.669,43.41 22.324,42.754 22.537,42.754 23.959,41.332 23.959,38.502 29.246,33.215 29.536,33.215 v1(29.666,33.085) ; v1(31.822,31.437) 35.251,31.437 v1(35.886,30.802)
OSCIN: C13.1 R6.2 U1.5 Y2.2 | length 26.4
  Top Layer w0.3: R6.2 18.466,51.355 18.741,51.63 19.567,51.63 20.329,52.392 24.281,52.392 24.456,52.216 24.456,51.933 24.632,51.757 25.345,51.757 v1(25.726,51.376) ; U1.5 20.471,44.614 21.685,45.828 21.685,46.7 Y2.2@22.297,47.312 ; v1(23.948,48.709) 23.163,48.709 22.424,47.97 Y2.2 24.154,47.82 24.329,47.644 24.329,46.599 24.576,46.352 25.009,46.352 25.884,45.478 C13.1
  Bottom Layer w0.3: v1(23.948,48.709) 24.075,48.582 24.535,48.582 24.71,48.758 24.71,50.057 24.886,50.233 25.551,50.233 25.726,50.409 v1(25.726,51.376)
OSCOUT: C14.1 R6.1 U1.6 Y2.1 | length 10.9
  Top Layer w0.3: Y2.1@17.979,47.312 18.233,47.312 18.845,46.7 18.845,46.368 19.021,46.192 19.16,46.192 19.971,45.381 19.971,44.674 U1.6 ; Y2.1@18.759,48.835 18.845,48.921 19.201,48.921 19.376,49.097 R6.1 ; R6.1@19.376,50.796 20.018,50.796 20.344,51.122 C14.1
OUT: H2.3 J1.7 U1.12 | length 58.9
  Top Layer w0.3: J1.7 v1(6.016,45.026) ; v1(7.032,46.449) 8.149,46.449 11.342,43.256 16.401,43.256 16.613,43.044 16.613,43.037 16.971,42.678 U1.12 ; v1(7.26,54.754) 9.521,54.754 11.045,56.278 11.045,61.282 12.467,62.705 v1(12.467,62.73) ; v1(28.393,59.834) 31.365,59.834 H2.3
  Bottom Layer w0.3: v1(6.016,45.026) 6.016,45.433 v1(7.032,46.449) 7.032,54.526 v1(7.26,54.754) ; v1(12.467,62.73) 13.534,63.797 27.837,63.797 28.012,63.621 28.012,60.215 v1(28.393,59.834)
PA0: J1.5 U1.10 | length 17.8
  Top Layer w0.3: J1.5 8.255,50.106 14.097,44.264 16.902,44.264 17.971,43.195 U1.10
PA1: J1.6 R18.1 U1.11 | length 28.7
  Top Layer w0.3: R18.1 14.114,41.216 14.019,41.311 14.019,41.355 13.844,41.531 10.552,41.531 5.787,46.296 5.533,46.296 J1.6 8.63,47.566 12.44,43.756 16.703,43.756 17.471,42.988 U1.11
PA3: J1.8 U1.13 | length 12
  Top Layer w0.3: J1.8 8.073,42.486 10.043,40.517 14.669,40.517 14.695,40.49 U1.13
PA4: J1.9 U1.14 | length 11.3
  Top Layer w0.3: J1.9 4.334,40.017 14.462,40.017 14.488,39.99 U1.14
PA5: J1.10 U1.15 | length 12.1
  Top Layer w0.3: J1.10 4.48,37.406 4.988,37.914 9.855,37.914 11.436,39.495 14.276,39.495 14.281,39.49 14.695,39.49 U1.15
PA6: J1.11 U1.16 | length 12.9
  Top Layer w0.3: J1.11 6.096,34.866 6.215,34.985 7.257,34.985 9.272,37.001 9.649,37.001 11.643,38.995 14.069,38.995 14.074,38.99 14.25,38.99 U1.16
PA7: J1.12 U1.17 | length 13.9
  Top Layer w0.3: J1.12 6.422,34.485 8.565,34.485 v1(8.652,34.572) ; U1.17 v1(14.042,38.491) ; v1(14.042,38.491) v1(14.042,38.491)
  Bottom Layer w0.3: v1(8.652,34.572) 8.652,34.59 12.712,38.651 13.882,38.651 v1(14.042,38.491)
PA8: J2.16 U1.29 | length 31.5
  Top Layer w0.3: v1(18.694,31.222) 18.694,31.562 18.971,31.84 18.971,31.921 U1.29 ; v1(19.635,26.806) 19.635,26.738 20.038,26.335 20.038,26.006 20.354,25.69 22.456,25.69 v1(22.551,25.595) ; v1(39.873,23.125) 40.389,23.125 J2.16
  Bottom Layer w0.3: v1(18.694,31.222) 18.694,31.064 18.623,30.993 18.623,29.794 18.749,29.668 18.749,29.563 19.635,28.678 v1(19.635,26.806) ; v1(22.551,25.595) 37.402,25.595 v1(39.873,23.125)
PA9: J2.15 U1.30 | length 30.5
  Top Layer w0.3: v1(19.198,31.285) 19.296,31.285 19.471,31.461 U1.30 ; v1(19.249,29.77) 19.964,29.77 20.837,28.897 v1(21.535,28.897) ; v1(29.536,30.548) 30.679,30.548 v1(30.806,30.421) ; v1(39.696,25.722) 40.331,25.722 J2.15
  Bottom Layer w0.3: v1(19.198,31.285) 19.198,30.899 19.187,30.888 19.187,30.36 19.249,30.298 v1(19.249,29.77) ; v1(21.535,28.897) 23.182,28.897 23.563,29.278 26.488,29.278 27.758,30.548 v1(29.536,30.548) ; v1(30.806,30.421) 32.838,30.421 35.886,27.373 39.148,27.373 39.696,26.824 v1(39.696,25.722)
PA10: J2.14 U1.31 | length 26.4
  Top Layer w0.3: v1(19.971,32.697) U1.31 ; v1(28.404,32.951) 28.825,32.951 29.717,33.843 30.124,33.843 35.069,28.897 35.251,28.897 v1(35.886,28.262) ; v1(38.807,28.262) 39.569,28.262 40.077,27.754 40.738,27.754 41.5,26.992 J2.14
  Bottom Layer w0.3: v1(19.971,32.697) 19.971,32.375 20.147,32.199 23.186,32.199 23.948,32.961 28.393,32.961 v1(28.404,32.951) ; v1(35.886,28.262) 35.986,28.162 38.707,28.162 v1(38.807,28.262)
PA11: J2.13 R9.2 U1.32 | length 38.5
  Top Layer w0.3: R9.2 19.662,18.176 19.757,18.271 v1(19.757,20.515) ; v1(20.298,30.231) 20.455,30.388 ; 20.456,30.388 20.456,30.485 ; U1.32 20.471,32.629 20.471,32.507 20.394,32.43 20.394,32.123 20.371,32.1 20.371,30.789 20.456,30.704 20.456,30.485 ; v1(21.471,29.913) 21.027,29.913 20.456,30.485 ; v1(26.615,30.421) 27.25,31.056 v1(30.679,31.056) ; v1(36.902,29.278) 36.986,29.362 38.522,29.362 38.566,29.318 40.059,29.318 40.273,29.532 J2.13
  Bottom Layer w0.3: v1(19.757,20.515) 20.24,20.998 20.24,30.094 20.298,30.152 v1(20.298,30.231) ; v1(21.471,29.913) 26.107,29.913 v1(26.615,30.421) ; v1(30.679,31.056) 30.798,30.937 34.608,30.937 36.267,29.278 v1(36.902,29.278)
PA12: J2.12 R10.2 R11.2 U1.33 | length 38.3
  Top Layer w0.3: R11.2 20.678,18.176 20.773,18.271 20.773,18.89 ; v1(20.773,20.769) 20.773,18.89 ; v1(20.955,30.912) 20.871,30.996 20.871,31.893 20.894,31.916 20.894,32.223 20.971,32.3 20.971,32.421 U1.33 ; R10.2 21.662,18.663 21.487,18.839 20.824,18.839 20.773,18.89 ; v1(27.25,31.818) v1(30.536,31.818) ; v1(39.362,32.138) 39.427,32.072 J2.12
  Bottom Layer w0.3: v1(20.773,20.769) 20.773,25.61 20.798,25.635 20.798,30.439 20.773,30.464 20.773,30.753 20.796,30.753 v1(20.955,30.912) ; v1@20.949,30.929 21.631,30.929 21.723,30.837 26.015,30.837 26.999,31.821 27.248,31.821 v1(27.25,31.818) ; v1(30.536,31.818) 30.816,32.098 39.322,32.098 v1(39.362,32.138)
PA15: J2.11 U1.38 | length 20.7
  Top Layer w0.3: U1.38 24.747,35.49 27.646,35.49 27.86,35.704 28.139,35.704 28.495,36.06 28.79,36.06 v1(28.891,36.161) ; v1(38.985,36.339) 39.874,36.339 J2.11
  Bottom Layer w0.3: v1(28.891,36.161) 28.891,35.194 29.067,35.019 30.252,35.019 30.339,35.105 38.538,35.105 39.036,35.603 39.036,36.289 v1(38.985,36.339)
PB0: J1.13 U1.18 | length 14.8
  Top Layer w0.3: J1.13 6.521,32.044 7.045,32.044 9.076,34.075 v1(9.076,34.114) ; v1(14.092,37.99) U1.18
  Bottom Layer w0.3: v1(9.076,34.114) 9.076,34.307 12.802,38.033 13.793,38.033 13.836,37.99 v1(14.092,37.99)
PB1: J1.14 U1.19 | length 16.4
  Top Layer w0.3: J1.14 6.411,29.394 6.411,30.522 6.935,31.046 9.589,33.699 v1(9.589,34.088) ; v1(14.296,37.49) 14.695,37.49 U1.19
  Bottom Layer w0.3: v1(9.589,34.088) 10.899,35.398 10.899,35.423 13.009,37.533 13.586,37.533 13.629,37.49 v1(14.296,37.49)
PB3: J2.10 U1.39 | length 18.3
  Top Layer w0.3: U1.39 27.439,35.99 27.653,36.204 27.932,36.204 28.269,36.541 v1(28.359,36.541) ; v1(38.934,37.152) J2.10
  Bottom Layer w0.3: v1(28.359,36.541) 28.382,36.564 28.567,36.564 29.366,37.363 38.724,37.363 v1(38.934,37.152)
PB4: J2.9 U1.40 | length 21
  Top Layer w0.3: U1.40 27.231,36.49 27.446,36.704 27.706,36.704 28.038,37.036 v1(28.136,37.036) ; v1(38.426,42.105) 39.188,42.105 J2.9
  Bottom Layer w0.3: v1(28.136,37.036) 28.253,37.153 28.267,37.153 33.219,42.105 38.172,42.105 38.175,42.102 38.424,42.102 v1(38.426,42.105)
PB5: J2.8 U1.41 | length 19.7
  Top Layer w0.3: 24.837,36.99 27.024,36.99 27.239,37.204 27.499,37.204 v1(27.793,37.498) ; v1(39.061,43.121) 40.712,43.121 J2.8
  Bottom Layer w0.3: v1(27.793,37.498) 33.416,43.121 v1(39.061,43.121)
PB6: J2.7 R15.2 U1.42 U5.14 | length 49.2
  Top Layer w0.3: U1.42 26.817,37.49 27.164,37.836 27.424,37.836 v1(27.5,37.913) ; v1(39.823,45.788) 40.585,45.788 J2.7 v1(43.379,44.772) ; v1(44.547,52.784) 44.664,52.9 R15.2 ; U5.14 57.349,54.17 v1(57.73,53.789)
  Bottom Layer w0.3: v1(27.5,37.913) 35.376,45.788 v1(39.823,45.788) ; v1(43.379,44.772) 43.506,44.899 43.506,51.743 v1(44.547,52.784) 57.36,52.784 57.73,53.154 v1(57.73,53.789)
PB7: J2.6 R16.2 U1.43 U5.15 | length 50.5
  Top Layer w0.3: U1.43 26.498,37.99 26.845,38.336 v1(26.996,38.336) ; v1(37.918,47.439) 41.474,47.439 J2.6 44.337,47.312 44.852,47.828 44.852,50.489 45.134,50.771 45.134,50.826 45.229,50.921 R16.2 45.337,50.868 v1(45.919,50.868) ; U5.15 55.317,56.583 v1(57.646,56.583)
  Bottom Layer w0.3: v1(26.996,38.336) 36.099,47.439 v1(37.918,47.439) ; v1(45.919,50.868) 46.379,50.868 46.729,50.518 58.269,50.518 58.492,50.741 58.492,53.734 57.646,54.58 v1(57.646,56.583)
PB8: J2.5 U1.45 | length 22.7
  Top Layer w0.3: U1.45 v1(25.16,38.99) ; v1(39.061,50.487) 40.877,50.487 41.512,49.852 J2.5
  Bottom Layer w0.3: v1(25.16,38.99) 30.053,43.883 30.425,43.883 37.029,50.487 v1(39.061,50.487)
PB9: J2.4 U1.46 | length 23
  Top Layer w0.3: U1.46 24.954,39.49 25.155,39.691 v1(25.155,39.787) ; v1(38.426,51.122) 39.696,52.392 J2.4
  Bottom Layer w0.3: v1(25.155,39.787) 36.49,51.122 v1(38.426,51.122)
PB10: J1.15 U1.21 | length 17.8
  Top Layer w0.3: J1.15 4.263,24.96 v1(5.914,26.611) ; v1(7.974,30.267) 9.724,32.017 v1(9.724,32.326) ; v1(13.404,36.496) 13.428,36.496 13.435,36.489 14.412,36.489 14.413,36.49 U1.21
  Bottom Layer w0.3: v1(5.914,26.611) 5.914,28.008 7.974,30.068 v1(7.974,30.267) ; v1(9.724,32.326) 9.978,32.326 11.947,34.295 11.947,35.057 13.386,36.496 v1(13.404,36.496)
PB11: J1.16 U1.22 | length 19.6
  Top Layer w0.3: J1.16 6.295,24.198 v1(6.295,25.087) ; v1(7.819,27.5) 7.819,29.405 v1(10.359,31.945) ; v1(13.507,35.91) 13.586,35.989 14.487,35.989 14.488,35.99 14.804,35.99 U1.22
  Bottom Layer w0.3: v1(6.295,25.087) 7.819,26.611 v1(7.819,27.5) ; v1(10.359,31.945) 10.359,32 12.518,34.159 12.518,34.612 13.507,35.601 v1(13.507,35.91)
PB13: H3.2 J2.19 U1.26 | length 48.9
  Top Layer w0.3: v1(17.09,30.97) 17.09,32.08 17.471,32.461 U1.26 ; v1(19.724,24.198) 19.732,24.19 21.234,24.19 21.353,24.071 v1(21.773,24.071) ; v1(38.391,18.36) 38.391,17.503 43.354,12.54 v1(43.354,10.508) ; H3.2 39.569,7.637 v1(39.569,10.533)
  Bottom Layer w0.3: v1(17.09,30.97) 17.09,29.151 17.225,29.016 17.225,28.872 18.122,27.975 18.122,26.197 18.63,25.689 18.63,24.628 19.052,24.206 19.622,24.206 19.63,24.198 v1(19.724,24.198) ; v1(21.773,24.071) 32.711,24.071 38.299,18.483 38.299,18.452 v1(38.391,18.36) ; v1(39.569,10.533) 43.328,10.533 v1(43.354,10.508)
PC13: J1.2 R5.2 U1.2 | length 40.1
  Top Layer w0.3: J1.2 6.295,57.726 v1(6.676,57.345) ; U1.2 21.971,43.811 v1(22.686,44.526) 22.957,44.526 24.473,43.01 v1(25.853,43.01) ; v1(26.933,44.328) 28.7,44.328 28.725,44.303 31.171,44.303 31.767,44.899 R5.2
  Bottom Layer w0.3: v1(6.676,57.345) 6.676,56.329 13.153,49.853 19.503,49.853 23.634,45.722 23.634,45.473 v1(22.686,44.526) ; v1(25.853,43.01) 25.853,43.248 v1(26.933,44.328)
PC14: C9.1 J1.3 U1.3 Y3.2 | length 36
  Top Layer w0.3: J1.3 5.605,55.186 8.653,52.138 v1(9.47,52.138) ; U1.3 21.471,44.018 22.297,44.844 v1(22.297,45.026) 23.164,45.026 24.68,43.51 26.06,43.51 26.243,43.328 v1@27.452,43.328 ; v1(27.472,43.328) v1@27.452,43.328 ; C9.1 27.452,42.719 v1@27.452,43.328 ; Y3.2@28.901,46.296 28.901,45.915 28.932,45.946 v1(28.932,44.803)
  Bottom Layer w0.3: v1(9.47,52.138) 13.534,48.074 19.249,48.074 v1(22.297,45.026) ; v1(27.472,43.328) 28.932,44.787 v1(28.932,44.803)
PC15: C12.1 J1.4 U1.4 Y3.1 | length 48.4
  Top Layer w0.3: J1.4 7.438,52.646 v1(9.216,50.868) ; U1.4 20.971,44.28 21.408,44.717 21.408,44.726 v1@21.558,44.876 ; v1@21.563,44.872 v1(21.59,44.899) 21.797,45.106 21.797,45.233 22.09,45.526 23.371,45.526 24.887,44.01 26.543,44.01 26.726,43.828 27.869,43.828 27.894,43.803 29.037,43.803 29.24,43.599 29.24,43.19 C12.1@29.69,42.74 ; Y3.1 29.282,50.614 v1(31.949,50.614) ; C12.1 29.887,42.543 31.109,43.765 31.7,43.765 34.362,46.428 34.362,46.931 33.854,47.439 v1(33.854,49.852)
  Bottom Layer w0.3: v1(9.216,50.868) 15.201,44.883 21.574,44.883 v1(21.59,44.899) ; v1(31.949,50.614) 33.092,50.614 v1(33.854,49.852)
R/W: L1.5 U5.5 | length 30.9
  Top Layer w0.3: v1(58.111,27.627) L1.5
  Bottom Layer w0.3: U5.5 47.62,49.09 48.185,48.525 48.185,48.475 53.697,42.963 53.697,41.01 54.809,39.898 54.809,32.779 58.111,29.477 v1(58.111,27.627)
RS: L1.4 U5.4 | length 42.1
  Top Layer w0.3: v1(57.222,26.865) 57.222,25.976 L1.4
  Bottom Layer w0.3: U5.4 47.367,51.427 44.698,51.427 44.522,51.251 44.522,38.763 47.657,35.628 51.253,35.628 55.19,31.691 55.19,31.056 57.095,29.151 57.095,26.992 v1(57.222,26.865)
SWD: C1.2 H1.4 | length 9.3
  Top Layer w0.3: C1.2@18.983,57.472 23.135,57.472 24.456,58.793 H1.4
  Top Layer w0.6: C1.2 C1.2@18.983,57.472
SWDCLK: H1.3 U1.37 | length 46.6
  Top Layer w0.3: H1.3 21.916,58.691 22.424,58.183 v1(22.424,58.158) ; U1.37 28.822,34.99 v1(29.612,35.781) ; v1(24.38,57.066) 34.616,57.066 35.378,56.304 35.378,43.502 30.705,38.829 30.705,36.797 v1(30.679,36.771)
  Bottom Layer w0.3: v1(22.424,58.158) 23.516,57.066 v1(24.38,57.066) ; v1(29.612,35.781) 29.689,35.781 v1(30.679,36.771)
SWDIO: H1.2 U1.34 | length 57.8
  Top Layer w0.3: v1(10.232,30.929) 10.232,29.151 11.121,28.262 21.987,28.262 22.162,28.438 22.162,30.241 21.471,30.932 21.471,31.089 21.371,31.189 21.371,31.686 21.394,31.709 21.394,32.016 21.471,32.093 21.471,32.214 U1.34 ; v1(10.232,48.836) 10.232,52.814 16.415,58.996 17.979,58.996 19.376,60.393 H1.2
  Bottom Layer w0.3: v1(10.232,30.929) 7.131,34.031 7.131,43.953 7.684,44.506 7.684,46.288 v1(10.232,48.836)
VBAT: J1.1 U1.1 | length 31.2
  Top Layer w0.3: J1.1 4.644,59.885 v1(7.819,59.885) ; U1.1 22.471,43.604 v1(22.822,43.954)
  Bottom Layer w0.3: v1(7.819,59.885) 9.863,59.885 15.915,53.833 15.915,52.977 16.533,52.36 17.758,52.36 24.368,45.749 24.368,45.501 v1(22.822,43.954)
VCC3V3: C1.1 C3.1 C4.1 C6.1 C8.1 C10.1 C11.1 D3.A D3.K H1.1 J1.18 J2.1 L1.2 LED1.1 LED2.1 LS1.1 P1.1 P1.2 R2.2 R12.1 R13.1 R14.1 R15.1 R16.1 R17.2 T1.1 U1.9 U1.24 U1.36 U1.48 U2.5 U5.16 | length 243.5
  Top Layer w0.3: 14.957,34.241 14.632,34.566 14.632,34.839 14.783,34.99 U1.24 ; LED1.1 25.625,53.535 25.98,53.891 27.784,53.891 LED2.1 ; U1.9 18.471,43.461 18.513,43.502 ; 22.471,32.17 U1.36 ; U1.48 U1.48@24.609,40.49 ; 24.609,41.369 U1.48@24.609,40.49 ; 27.123,39.464 26.934,39.464 25.98,40.417 C10.1 25.932,40.49 U1.48@24.609,40.49 ; 36.267,32.707 36.521,32.961 U2.5 ; v1(38.68,30.802) v1@38.701,30.823 ; v1@39.776,21.451 v1(39.823,21.404) ; J2.1 J2.1@41.622,60.033 ; R12.1 45.898,60.033 v1(45.919,60.012)
  Top Layer w0.5: J1.18 7.337,17.086 8.124,17.874 8.124,19.144 7.206,20.062 7.206,20.476 7.498,20.769 P1.2 10.232,19.69 10.525,19.398 15.239,19.398 15.532,19.69 P1.1 18.728,20.769 19.021,21.062 v1(19.021,21.379) ; v1(13.788,29.151) 16.844,29.151 17.979,30.286 ; C4.1 13.915,30.638 14.208,30.345 17.979,30.345 ; C4.1@13.915,32.248 14.39,32.723 14.947,32.723 ; v1(14.931,58.361) 14.931,59.643 15.224,59.936 16.543,59.936 16.836,60.229 H1.1 ; 14.957,32.733 14.957,34.241 ; v1(16.074,57.726) 16.201,57.599 C1.1 17.356,56.443 17.065,56.151 17.065,53.561 LED1.1 17.09,51.198 16.303,50.411 16.303,45.687 16.648,45.342 17.307,45.342 C11.1 17.52,45.153 18.045,44.628 18.045,43.97 18.513,43.502 v1(18.995,43.502) ; 17.979,30.37 19.518,30.37 v1(19.787,30.639) ; v1(21.971,31.437) 21.994,31.46 21.994,31.718 22.258,31.981 22.282,31.981 22.471,32.17 24.011,32.17 24.194,31.987 C3.1@24.194,31.281 ; C3.1 24.469,31.056 24.694,31.281 24.694,31.37 26.996,33.672 28.698,33.672 30.146,35.12 30.552,35.12 ; v1(24.456,42.105) 24.609,41.953 24.609,41.369 ; v1(25.447,56.228) 27.347,56.228 27.885,55.689 LED2.1 ; 27.123,39.464 28.419,39.464 29.816,38.067 29.816,36.568 30.552,35.831 30.552,35.12 ; C6.1@31.829,35.12 30.552,35.12 ; C6.1 31.949,33 32.242,32.707 36.267,32.707 ; U2.5 C8.1 39.073,33.977 39.366,33.684 39.366,33.012 38.762,32.408 38.762,31.889 39.519,31.132 39.519,30.828 R2.2@39.524,30.823 ; v1(38.274,28.762) 37.791,28.28 D3.K 35.874,25.421 35.581,25.128 35.581,21.926 35.991,21.516 37.727,21.516 D3.A v1@39.776,21.451 ; v1@38.701,30.823 R2.2@39.524,30.823 ; v1(39.01,59.961) 41.55,59.961 J2.1 ; J2.1@41.622,60.033 44.522,60.033 ; v1(44.141,20.388) 44.725,19.804 LS1.1 57.248,19.804 58.543,18.509 58.543,16.744 58.836,16.451 L1.2 ; T1.1 44.623,33.189 44.623,32.088 43.358,30.823 R2.2 R2.2@39.524,30.823 ; R16.1 43.952,51.831 43.659,52.124 43.659,53.701 44.09,54.133 ; R15.1 45.279,53.815 44.408,53.815 44.09,54.133 ; R14.1 44.383,54.985 44.09,55.278 ; R13.1 R13.1@45.239,57.874 ; R12.1 44.522,60.033 ; U5.16 R17.2@57.304,59.25 ; R17.2 58.453,59.301 58.746,59.594 v1(58.746,60.647) ; 44.09,54.133 44.09,55.278 ; 44.09,55.278 44.09,57.142 44.065,57.167 44.065,57.581 44.358,57.874 R13.1@45.239,57.874 ; 44.522,60.033 44.522,58.591 R13.1@45.239,57.874
  Top Layer w0.6: C4.1 C4.1@13.915,32.248
  Bottom Layer w0.5: v1(13.788,29.151) 13.763,29.126 13.763,27.186 19.021,21.928 v1(19.021,21.379) ; v1(14.931,58.361) 15.541,57.752 16.049,57.752 v1(16.074,57.726) ; H1.1@16.811,61.917 H1.1 ; v1(18.995,43.502) 19.503,44.01 21.917,44.01 22.573,43.354 23.207,43.354 v1(24.456,42.105) ; v1(19.787,30.639) 19.856,30.708 19.856,31.028 20.392,31.564 21.844,31.564 v1(21.971,31.437) ; v1(25.447,56.228) 25.447,57.611 25.74,57.904 38.108,57.904 38.401,58.197 38.401,59.668 38.694,59.961 v1(39.01,59.961) ; v1(38.274,28.762) 38.452,28.94 38.452,30.574 v1(38.68,30.802) ; v1(39.823,21.404) 40.464,20.763 43.766,20.763 v1(44.141,20.388) ; v1(45.919,60.012) 45.977,60.07 45.977,60.199 46.705,60.927 56.714,60.927 56.74,60.952 58.441,60.952 v1(58.746,60.647)
VO: L1.3 T1.2 | length 28.1
  Top Layer w0.3: T1.2 51.888,38.422 52.777,37.533 52.777,30.802 56.206,27.373 56.206,24.452 L1.3
pads on no net: L1. U5.7 U5.13

## Polygon pours and split planes (outlines as drawn)
D0 on Top Layer "D0_L01_P000" (solid, remove dead copper, pour order 0): -0.127,0.762 -0.127,90.018 cw(c0.711,90.018) 0.711,90.856 97.968,90.856 cw(c97.968,89.586) 99.238,89.586 99.238,0.533 cw(c98.196,0.533) 98.196,-0.508 1.143,-0.508 cw(c1.143,0.762)
D0 on Bottom Layer "D0_L02_P001" (solid, remove dead copper, pour order 1): -0.127,0.762 -0.127,90.018 cw(c0.711,90.018) 0.711,90.856 97.968,90.856 cw(c97.968,89.586) 99.238,89.586 99.238,0.533 cw(c98.196,0.533) 98.196,-0.508 1.143,-0.508 cw(c1.143,0.762)

## Silkscreen, mask and mechanical layers (free items; w line width, h text height)
Mechanical 1:
  the board outline again, w0.4

## Text inside footprints (layer, text, board x,y; h text height)
L1: Top Overlay "16" at 62.227,54.011 h0.5 r90; Top Overlay "1" at 62.227,11.811 h0.5 r90
LS1: Top Overlay "+" at 50.148,18.394 h1.52 r270